# EAGLE board Juice Rescue v2 - hw1.0.2 (EAGLE 9.6.2)
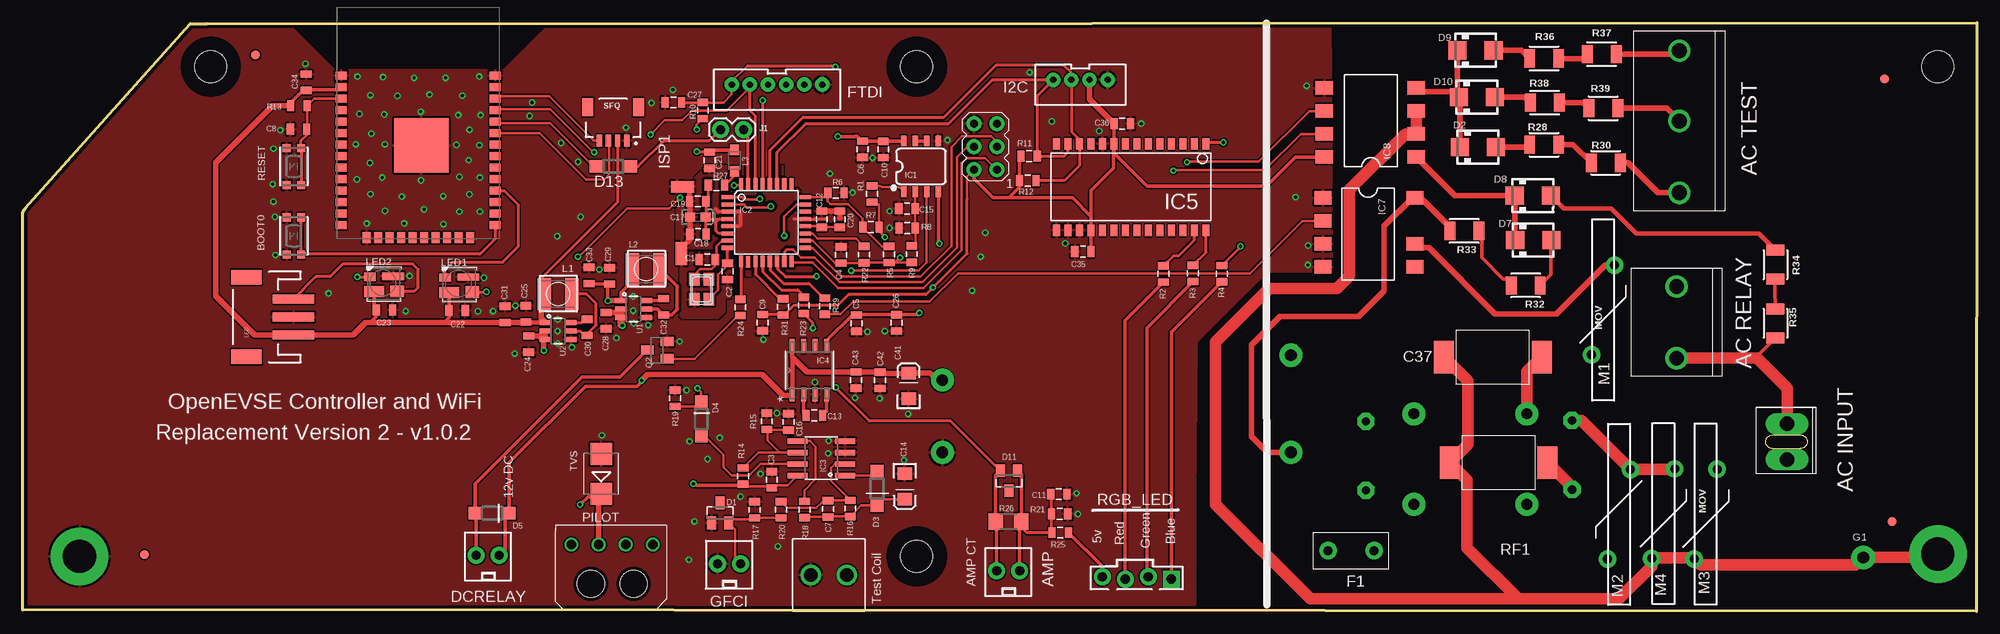
[diagram p0: board, top side]
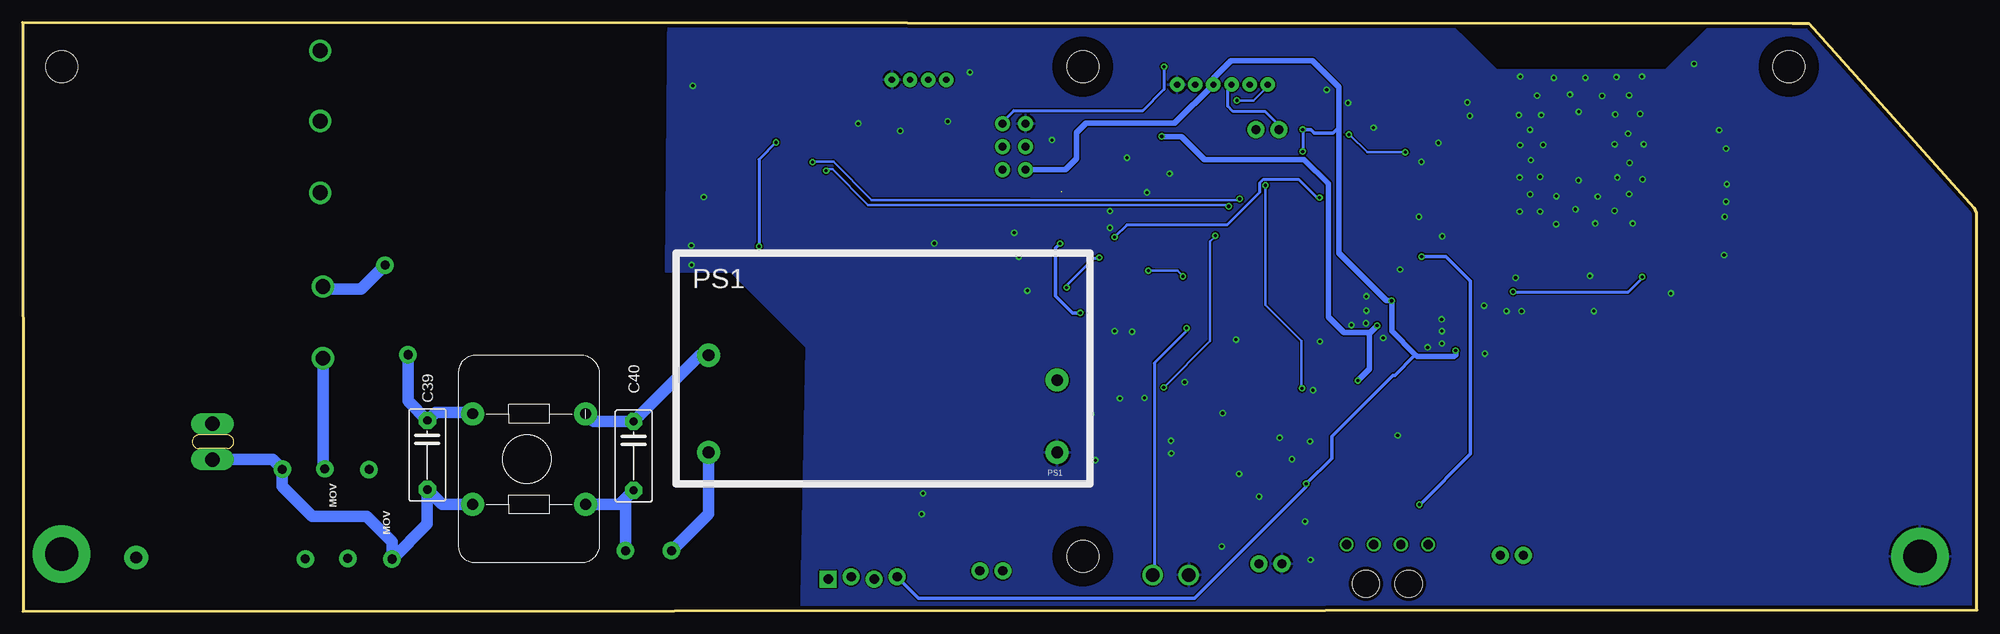
[diagram p1: board, bottom side, seen from below]

Size 215.82 x 65.06 mm. Coordinates in mm from the lower left corner, seen from the top.
Outline: 215.82,65.06 215.77,0 0,0.15 0.03,44.03 0.18,44.4 0.3,44.54 18.53,64.96 20.38,64.96 215.82,65.06
Copper layers (1*16): Top 0.0356mm / dielectric 1.5011mm / Bottom 0.0356mm
Design rules "default": minimum track width 6mil, minimum drill 13mil, track to track 6mil, track to pad 6mil, pad to pad 6mil, via to via 6mil, smd to smd 6mil, copper to edge 15mil, drill to drill 6mil, minimum pad ring 7mil, minimum via ring 7mil, stop-mask expansion 4mil, vias tented up to drill 0mil, thermal gap 10mil
Holes 3.56 mm at 211.51,60.18 98.74,60.18 98.74,6.08 20.76,60.18
tRestrict: area 95.6,2.9 to 101.9,9.3; area 17.6,57 to 23.9,63.4; area 95.6,57 to 101.9,63.4
bRestrict: area 95.6,2.9 to 101.9,9.3; area 17.6,57 to 23.9,63.4; area 95.6,57 to 101.9,63.4

## Footprints (pad centres in the part's own frame; a part is rotated, then mirrored left to right if it is on the bottom)
2POS3.66MM = drill 1.6 pad 1.93 long: P$5 0,2; P$6 0,-1.96
ACAMP3P = drill 1.65: P$1 0,7.77; P$2 0,-0.15; P$3 0,-7.92
MOLEX_2 = drill 1.016 pad 1.88: 1 -1.27,0; 2 1.27,0
BTN_KMR2_4.6X2.8 = smd 0.9 x 0.9: A 2.05,0.8; A' -2.05,0.8; B 2.05,-0.8; B' -2.05,-0.8
0805 = smd 0.8 x 1.2: 1 -0.9,0; 2 0.9,0
EIA3216 = smd 1.4 x 1.6: A 1.4,0; C -1.4,0
0603-POLAR = smd 1.1 x 1: + 0.85,0; - -0.85,0
DK1E3EA = smd 2.2 x 3.6: P$1 -5.4,0; P$2 5.4,0
C7.5B4 = drill 0.914 pad 1.905 octagon: 1 -3.81,0; 2 3.81,0
RN214-0.3-02-47M = drill 1.2 pad 2.54: P$1 14,6.5; P$2 1.5,6.5; P$3 14,16.5; P$4 1.5,16.5
SOT23 = smd 1 x 1.4: 1 -0.95,-1.1; 2 0.95,-1.1; 3 0,1.1
SMA = smd 2 x 2: A 2,0; C -2,0
SOD123 = smd 1.4 x 1.4: A 1.9,0; C -1.9,0
BELFUSE1A = drill 1 pad 1.93: IN 2,1.66; OUT 2,6.74
FIDUCIAL-1X2.5 = smd 1 x 1: 1 0,0
JST6 = drill 0.7 pad 1.6: 1 -5,-0.28; 2 -3,-0.28; 3 -1,-0.28; 4 1,-0.28; 5 3,-0.28; 6 5,-0.28
1X01 = drill 1.31 pad 2.6: 1 0,0
JST-4-PTH-VERT = drill 0.7 pad 1.6: 1 -3,-0.55; 2 -1,-0.55; 3 1,-0.55; 4 3,-0.55
SO08 = smd 0.6 x 1.2: 1 -1.905,-2.8; 2 -0.635,-2.8; 3 0.635,-2.8; 4 1.905,-2.8; 5 1.905,2.8; 6 0.635,2.8; 7 -0.635,2.8; 8 -1.905,2.8
TQFP32-08 = smd 1.27 x 0.457: 1 -4.293,2.8; 2 -4.293,2; 3 -4.293,1.2; 4 -4.293,0.4; 5 -4.293,-0.4; 6 -4.293,-1.2; 7 -4.293,-2; 8 -4.293,-2.8; 17 4.293,-2.8; 18 4.293,-2; 19 4.293,-1.2; 20 4.293,-0.4; 21 4.293,0.4; 22 4.293,1.2; 23 4.293,2; 24 4.293,2.8 | smd 0.457 x 1.27: 9 -2.8,-4.293; 10 -2,-4.318; 11 -1.2,-4.293; 12 -0.4,-4.293; 13 0.4,-4.293; 14 1.2,-4.293; 15 2,-4.293; 16 2.8,-4.293; 25 2.8,4.293; 26 2,4.293; 27 1.2,4.293; 28 0.4,4.293; 29 -0.4,4.293; 30 -1.2,4.293; 31 -2,4.293; 32 -2.8,4.293
SO08' = smd 0.61 x 2.21: 1 -1.905,-2.616; 2 -0.635,-2.616; 3 0.635,-2.616; 4 1.905,-2.616; 5 1.905,2.616; 6 0.635,2.616; 7 -0.635,2.616; 8 -1.905,2.616
SO-8 = smd 1.549 x 0.559: 1 -2.68,1.905; 2 -2.68,0.635; 3 -2.68,-0.635; 4 -2.68,-1.905; 5 2.68,-1.905; 6 2.68,-0.635; 7 2.68,0.635; 8 2.68,1.905
SO28W = smd 0.762 x 1.27: 1 -7.62,-4.78; 2 -6.35,-4.78; 3 -5.08,-4.78; 4 -3.81,-4.78; 5 -2.54,-4.78; 6 -1.27,-4.78; 7 0,-4.78; 8 1.27,-4.78; 9 2.54,-4.78; 10 3.81,-4.78; 11 5.08,-4.78; 12 6.35,-4.78; 13 7.62,-4.78; 14 8.89,-4.78; 15 8.89,4.78; 16 7.62,4.78; 17 6.35,4.78; 18 5.08,4.78; 19 3.81,4.78; 20 2.54,4.78; 21 1.27,4.78; 22 0,4.78; 23 -1.27,4.78; 24 -2.54,4.78; 25 -3.81,4.78; 26 -5.08,4.78; 27 -6.35,4.78; 28 -7.62,4.78
SIL8 = smd 1.5 x 1.9: P$1 -4,-5; P$2 -1.46,-5; P$3 1.08,-5; P$4 3.62,-5; P$5 3.62,5.16; P$6 1.08,5.16; P$8 -4,5.16
SIL8-2 = smd 1.5 x 1.9: P$1 -4,-5; P$2 -1.46,-5; P$3 1.08,-5; P$4 3.62,-5; P$5 3.62,5.16; P$6 1.08,5.16; P$7 -1.46,5.16; P$8 -4,5.16
AVRISP = drill 0.9 pad 1.626: 1 -1.27,2.54; 2 1.27,2.54; 3 -1.27,0; 4 1.27,0; 5 -1.27,-2.54; 6 1.27,-2.54
1X02 = drill 1.016 pad 1.88: 1 0,0; 2 2.54,0
MICROBUILDER_INDUCTOR_5X5MM_NR5040_NOTHERMALS = smd 1.5 x 3.6: P$1 -1.55,0; P$2 1.5,0
INDC2012X87 = smd 1.15 x 1: 1 -1.175,0; 2 1.175,0
JST-3-SMD = smd 1 x 4.6: 1 -1.99,-4.77; 2 0.01,-4.77; 3 2.01,-4.77 | smd 1.6 x 3.4: NC1 -4.39,0.43; NC2 4.41,0.43
LED3535 = smd 1.3 x 0.9: 1 -1.55,0.775 | smd 2.2 x 1.2: 2 -1.1,-0.875 | smd 1.5 x 1.3: 3 1.45,-0.825 | smd 2.4 x 0.8: 4 1,0.825
MOV = drill 1 pad 1.93: P$1 0,1.27; P$2 9.89,-1.27
IRM-10-5 = drill 1.3 pad 2.54: AC/L 3.6,3.45; AC/N 3.6,14.2; V+ 42.1,11.45; V- 42.1,3.45
NX3225 = smd 1.4 x 1.2: 1 -1.1,0.8; 2 1.1,0.8; 3 1.1,-0.8; 4 -1.1,-0.8
R1206 = smd 1.6 x 1.803: 1 -1.422,0; 2 1.422,0
1210 = smd 1.2 x 2: 1 -1.6,0; 2 1.6,0
GFCI_4 = drill 1.016 pad 1.88 square: 1 0,0.127 | drill 1.016 pad 1.88: 2 2.54,-0.127; 3 5.08,0.127; 4 7.62,-0.127
JST04_1MM_RA = smd 0.6 x 1.35: 1 -1.5,0; 2 -0.5,0; 3 0.5,0; 4 1.5,0 | smd 1.2 x 2: NC1 2.8,-3.675; NC2 -2.8,-3.675
SHORT_TOP-50 = smd 1.27 x 1.27: 1 0.635,0; 2 -0.635,0
2X4MM = drill 1.5: P$1 0,2; P$2 0,-2
SMB = smd 2.4 x 2.4: A 2.2,0; C -2.2,0
SOT23-6 = smd 0.55 x 1.35: 1 -0.95,-1.375; 2 0,-1.375; 3 0.95,-1.375; 4 0.95,1.375; 5 0,1.375; 6 -0.95,1.375
HOLE = drill 3.683 pad 6.35: P$1 0,0
AMPAC = drill 1.65: P$1 0,3.96; P$2 0,-3.96
4X3MM_MOLEX = drill 1.02: P$1 4.5,3; P$2 1.5,3; P$3 -1.5,3; P$4 -4.5,3 | hole 3: -2.35,-1.32; 2.35,-1.32
WROOM32_SKINNY = smd 1.2 x 0.9: 1 -8.5,5; 2 -8.5,3.73; 3 -8.5,2.46; 4 -8.5,1.19; 5 -8.5,-0.08; 6 -8.5,-1.35; 7 -8.5,-2.62; 8 -8.5,-3.89; 9 -8.5,-5.16; 10 -8.5,-6.43; 11 -8.5,-7.7; 12 -8.5,-8.97; 13 -8.5,-10.24; 14 -8.5,-11.51; 25 8.5,-11.51; 26 8.5,-10.24; 27 8.5,-8.97; 28 8.5,-7.7; 29 8.5,-6.43; 30 8.5,-5.16; 31 8.5,-3.89; 32 8.5,-2.62; 33 8.5,-1.35; 34 8.5,-0.08; 35 8.5,1.19; 36 8.5,2.46; 37 8.5,3.73; 38 8.5,5 | smd 0.9 x 1.2: 15 -5.7,-12.9; 16 -4.43,-12.9; 17 -3.16,-12.9; 18 -1.89,-12.9; 19 -0.62,-12.9; 20 0.65,-12.9; 21 1.92,-12.9; 22 3.19,-12.9; 23 4.46,-12.9; 24 5.73,-12.9 | smd 6 x 6: P$1 0.34,-2.7

## Placement (x,y rotation side)
AC  2POS3.96MM  [2POS3.66MM]  194.88,18.73 0 top
AC_TEST  AMPAC3P  [ACAMP3P]  182.96,54.03 180 top
AMP  AMP_CT  [MOLEX_2]  108.85,4.47 0 top
BOOT0  KMR2  [BTN_KMR2_4.6X2.8]  29.95,41.49 90 top
C1  22pf  [0805]  75.59,38.88 0 top
C2  22pf  [0805]  77.86,37.57 270 top
C3  .1uf  [0805]  82.74,14.55 90 top
C4  .1uf  [0805]  90.38,39.38 90 top
C5  10uf  [0805]  92.08,31.86 270 top
C6  10uf  [0805]  92.74,51.06 90 top
C7  .1uf  [0805]  88.94,11.33 270 top
C8  1.0uF  [0805]  30.46,53.27 180 top
C9  .1uf  [0805]  81.72,31.9 270 top
C10  .1uf  [0805]  95.05,51.04 270 top
C11  .1uf  [0805]  114.45,12.95 0 top
C12  .1uf  [0805]  88.26,43.34 90 top
C13  10uf  [0805]  87.43,21.65 180 top
C14  10uf  [EIA3216]  97.42,13.8 270 top
C15  .1uf  [0805]  97.67,44.5 0 top
C16  .1uf  [0805]  84.58,20.94 270 top
C17  10uF  [0603-POLAR]  74.57,43.57 0 top
C18  1uF  [0805]  74.59,41.71 0 top
C19  0.1uF  [0805]  74.56,45.31 0 top
C20  1uf  [0805]  90.25,43.34 90 top
C21  .1uf  [0805]  75.86,49.86 270 top
C22  .1uf  [0805]  47.99,33.26 0 top
C23  .1uf  [0805]  39.96,33.31 0 top
C24  10uf  [0805]  55.89,29.52 270 top
C25  22  [0805]  55.58,32.88 90 top
C26  .1uf  [0805]  96.5,31.88 90 top
C27  .1uf  [0805]  71.86,56.24 0 top
C28  10uf  [0805]  64.45,32.14 270 top
C29  22  [0805]  64.83,37.07 90 top
C30  100nf  [0805]  62.34,31.38 270 top
C31  22  [0805]  53.3,32.82 90 top
C32  100nf  [0805]  70.77,33.66 270 top
C33  22  [0805]  62.54,37.12 90 top
C34  .1uf  [0805]  31.3,58.45 90 top
C35  .1uf  [0805]  117.1,39.76 180 top
C36  .1uf  [0805]  121.44,53.88 0 top
C37  1000pf  [DK1E3EA]  162.36,28.1 0 top
C39  10000pf  [C7.5B4]  171.13,17.28 270 bottom
C40  10000pf  [C7.5B4]  148.34,17.18 270 bottom
C41  10uf  [EIA3216]  97.85,24.9 90 top
C42  1uf  [0805]  94.7,25.53 270 top
C43  .1uf  [0805]  92.03,25.56 90 top
CMC  RN214-0.3-02-47M  [RN214-0.3-02-47M]  167.65,5.34 0 bottom
D1  AZ23C5V6-7-F  [SOT23]  77.03,10.89 0 top
D2  1N4004  [SMA]  160.71,51.32 0 top
D3  1N4148  [SOD123]  94.35,13.59 90 top
D4  1N4148  [SOD123]  74.95,21.27 270 top
D5  1N4148  [SOD123]  51.85,10.87 180 top
D7  1N4004  [SMA]  166.82,41.01 0 top
D8  1N4004  [SMA]  166.78,45.94 0 top
D9  1N4004  [SMA]  160.46,61.98 0 top
D10  1N4004  [SMA]  160.61,56.8 0 top
D11  AZ23C2V7-7-F  [SOT23]  108.92,14.44 180 top
D13  1N4148  [SOD123]  65.23,49.18 180 top
DCRELAY  AMP_CT  [MOLEX_2]  51.37,6.18 0 top
F1  BEL1.6AFUSE  [BELFUSE1A]  142.5,8.7 270 top
FID1  FIDUCIAL1X2.5  [FIDUCIAL-1X2.5]  206.46,9.94 0 top
FID2  FIDUCIAL1X2.5  [FIDUCIAL-1X2.5]  25.69,61.48 0 top
FID3  FIDUCIAL1X2.5  [FIDUCIAL-1X2.5]  205.62,58.81 0 top
FID4  FIDUCIAL1X2.5  [FIDUCIAL-1X2.5]  13.44,6.26 0 top
FTDI  JST6  [JST6]  83.32,57.92 180 top
G1  M01PTH  [1X01]  203.28,5.95 0 top
GFCI  AMP_CT  [MOLEX_2]  78.01,5.27 0 top
I2C  [JST-4-PTH-VERT]  116.82,58.2 180 top
IC1  LMV358  [SO08]  99.21,49.18 0 top
IC2  ATMEGA328P-AU  [TQFP32-08]  82.12,42.97 0 top
IC3  LM358  [SO08']  88.21,16.93 90 top
IC4  TC1044S  [SO-8]  86.9,26.65 90 top
IC5  MCP23017SO  [SO28W]  123.07,46.9 180 top
IC7  AQH2223  [SIL8]  148.6,41.69 270 top
IC8  HCPL-2731S  [SIL8-2]  148.9,54.21 90 top
ISP1  ISP1  [AVRISP]  106.33,51.35 180 top
J1  [1X02]  77.07,53.25 0 top
L1  3.3uh  [MICROBUILDER_INDUCTOR_5X5MM_NR5040_NOTHERMALS]  59.11,35.06 180 top
L2  3.3uh  [MICROBUILDER_INDUCTOR_5X5MM_NR5040_NOTHERMALS]  68.84,37.8 180 top
L3  BLM21PG331SN1D  [INDC2012X87]  78.62,49.8 270 top
LED  3-PIN SMD  [JST-3-SMD]  25.15,32.52 90 top
LED1  WS2812B3535  [LED3535]  48.22,36.13 0 top
LED2  WS2812B3535  [LED3535]  39.91,36.2 0 top
M1  MOV  [MOV]  174.54,28.36 90 top
M2  MOV  [MOV]  176.3,15.67 270 top
M3  MOV  [MOV]  185.87,5.8 90 top
M4  MOV  [MOV]  181.2,5.86 90 top
PS1  IRM-10-5  [IRM-10-5]  143.67,14.1 0 bottom
Q1  16000  [NX3225]  74.99,35.58 90 top
Q2  2222A  [SOT23]  70.08,28.87 90 top
R1  820  [0805]  93.81,46.11 90 top
R2  220  [0805]  125.99,37.3 90 top
R3  220  [0805]  129.27,37.35 90 top
R4  220  [0805]  132.44,37.32 90 top
R5  56k  [0805]  95.69,39.44 270 top
R6  100k  [0805]  89.82,46.25 0 top
R7  200k  [0805]  93.68,42.45 0 top
R8  100k  [0805]  97.69,42.37 0 top
R9  100k  [0805]  98.2,39.49 90 top
R10  10k  [0805]  75.11,55.33 270 top
R11  4.7k  [0805]  111.16,50.3 180 top
R12  4.7k  [0805]  111,47.61 180 top
R13  10k  [0805]  30.51,55.86 0 top
R14  100k  [0805]  79.57,14.95 90 top
R15  20k  [0805]  82.18,21 90 top
R16  100k  [0805]  91.41,11.38 90 top
R17  422  [0805]  80.84,11.22 270 top
R18  100  [0805]  86.34,11.25 270 top
R19  10k  [0805]  72.05,23.54 90 top
R20  1k  [0805]  83.75,11.24 270 top
R21  100k  [0805]  114.51,10.78 0 top
R22  10k  [0805]  92.92,39.43 270 top
R23  330  [0805]  86.27,33.8 270 top
R24  330  [0805]  79.26,33.59 90 top
R25  100k  [0805]  114.59,8.7 180 top
R26  22  [R1206]  108.87,9.94 180 top
R27  2.0  [0805]  76.62,47.1 0 top
R28  180k  [1210]  168.03,51.57 0 top
R29  330  [0805]  88.59,33.74 90 top
R30  180k  [1210]  174.83,49.56 0 top
R31  10k  [0805]  83.98,33.64 270 top
R32  180k  [1210]  166,36.02 180 top
R33  180k  [1210]  159.21,42.04 180 top
R34  180k  [1210]  193.58,38.31 270 top
R35  180k  [1210]  193.58,31.82 270 top
R36  180k  [1210]  168.03,61.09 0 top
R37  180k  [1210]  174.4,61.58 0 top
R38  180k  [1210]  168.1,56.22 0 top
R39  180k  [1210]  174.56,55.58 0 top
RESET  KMR2  [BTN_KMR2_4.6X2.8]  29.95,49.16 90 top
RF1  1000pf  [DK1E3EA]  163,16.44 0 top
RGB_LED  GFCI_CT  [GFCI_4]  126.85,3.69 180 top
SFQ  [JST04_1MM_RA]  65.21,52.03 180 top
SH1  SHORT-HT5  [SHORT_TOP-50]  72.89,46.91 0 top
SH2  SHORT-HT5  [SHORT_TOP-50]  72.77,39.55 270 top
TEST_COIL  2X4MM  [2X4MM]  89.03,4.02 270 top
TVS  P6SMB16CA  [SMB]  63.91,15.19 90 top
U1  AP63203  [SOT23-6]  67.47,33.41 270 top
U2  AP63203  [SOT23-6]  59.14,30.97 270 top
U$3  HOLE  [HOLE]  211.51,6.33 0 top
U$8  AMPAC  [AMPAC]  182.66,31.94 180 top
U$9  HOLE  [HOLE]  6.28,6.08 0 top
U$25  4X3MM_MOLEX  [4X3MM_MOLEX]  65.11,4.38 0 top
X2  ESP32-WROOM-32  [WROOM32_SKINNY]  43.69,54.19 0 top

## Library data of the parts
AC AC_TEST AMP C37 DCRELAY FTDI GFCI IC4 IC7 IC8 M1-M4 PS1 RF1 RGB_LED TEST_COIL U$3 U$8 U$9 U$25 = OpenEVSE
BOOT0 RESET X2 = microbuilder
C1-C7 C9-C16 C18-C21 C26 C27 C35 C36 C41-C43 G1 IC3 R1-R12 R14-R25 R27 R29 R31 = SparkFun
C8 C22-C25 C28-C34 = SparkFun-Capacitors; PROD_ID: CAP-11625
C17 = SparkFun-Capacitors; PROD_ID: CAP-13210
C39 C40 = capacitor-wima
CMC = Schaffner-CM-Choke
D1-D5 D7-D11 D13 TVS = diode
F1 = Qxd
FID1-FID4 = SparkFun-Retired
I2C J1 = SparkFun-Connectors
IC1 = SparkFun-IC-Amplifiers; PROD_ID: IC-09657
IC2 = atmel; MPN: ATMEGA8-16AU; OC_FARNELL: 9171371; OC_NEWARK: 73M8863
IC5 ISP1 LED1 LED2 Q1 = adafruit
L1 L2 = ESP32_v1_SMPS
L3 = BLM21PG331SN1D; DESCRIPTION: Ferrite Beads Multi-Layer 330Ohm 25% 100MHz 1.5A 70mOhm DCR 0805 Paper T/R; MF: Murata; MP: BLM21PG331SN1D; PACKAGE: 0805 Murata
LED = SparkFun-Connectors; PROD_ID: CONN-12591
Q2 = transistor-npn
R13 = SparkFun-Resistors
R26 = rcl
R28 R30 R32-R39 = SparkFun-Resistors; PROD_ID: RES-12374
SFQ = SparkFun-Connectors; PROD_ID: CONN-13694
SH1 SH2 = shorts-old; BOM: no
U1 U2 = SparkFun-IC-Power; PROD_ID: VREG-15244

## Nets
3.3V: C22.1 C23.1 C25.1 C31.1 C34.1 L1.P$2 LED1.2 LED2.2 LED.1 R13.1 SFQ.2 U2.1 X2.2
+5V: C3.1 C4.1 C9.1 C21.1 C24.1 C29.1 C33.1 C35.1 C36.1 FTDI.3 I2C.2 IC2.18 IC3.8 IC5.9 IC5.18 IC8.P$8 ISP1.2 L2.P$2 L3.1 R5.2 R9.1 R10.2 R11.2 R12.2 R14.1 R22.2 R25.1 R31.2 RGB_LED.4 U1.1 U2.2 U2.3
+12V: C6.2 C10.1 C28.1 C41.A C42.1 C43.2 D5.C DCRELAY.2 IC1.8 IC4.1 IC4.8 PS1.V+ U1.2 U1.3
-12V1: C5.1 C26.2 IC1.4 IC4.5
AC_RELAY_1: IC2.13 R29.2
ACL: C40.2 CMC.P$1 F1.OUT
ACLFUSE: F1.IN IC7.P$8 PS1.AC/L R33.2
ACLIN: AC.P$6 C39.2 CMC.P$2 M2.P$2 M3.P$2 RF1.P$2
ACN: C40.1 CMC.P$3 PS1.AC/N
ACNIN: AC.P$5 C37.P$2 C39.1 CMC.P$4 M1.P$1 M2.P$1 M4.P$2 R35.2 U$8.P$1
ACRELAY: IC7.P$6 M1.P$2 U$8.P$2
ACTEST1: AC_TEST.P$3 R37.2
ACTEST2: AC_TEST.P$2 R39.2
ACTEST3: AC_TEST.P$1 R30.2
ADC3: IC2.26
ADC6: IC2.19 R22.1
ADC7: IC2.22
AMP_READ: AMP.1 D11.2 IC2.23 R26.2
AREF: C12.1 C20.1 IC2.20
BLUE: IC5.1 R4.2
DAMP: L3.2 R27.2
DC_RELAY_1: IC2.9 R24.2
DC_RELAY_1_O: D5.A DCRELAY.1 Q2.3
DC_RELAY_1_T: Q2.1 R24.1
DC_RELAY_2: IC2.10
ESPRESET: C8.1 R13.2 RESET.B RESET.B' X2.3
ESPSCL: SFQ.4 X2.36
ESPSDA: SFQ.3 X2.33
GFCI_INT: D4.C IC2.32 R19.1
GFCI_TEST: IC2.12 R23.1
GFI_TEST_O: R23.2 TEST_COIL.P$1
GMI_LINE: IC2.2 IC8.P$7
GND: BOOT0.A BOOT0.A' C3.2 C4.2 C5.2 C6.1 C8.2 C9.2 C10.2 C11.2 C14.C C15.1 C16.1 C22.2 C23.2 C24.2 C25.2 C26.1 C27.1 C28.2 C29.2 C31.2 C33.2 C34.2 C35.2 C36.2 C41.C C42.2 C43.1 D1.1 FTDI.1 GFCI.1 I2C.1 IC1.5 IC3.3 IC3.4 IC4.3 IC5.10 IC5.15 IC5.16 IC5.17 IC7.P$1 IC7.P$3 IC7.P$4 IC8.P$5 ISP1.6 LED1.4 LED2.4 LED.2 PS1.V- Q2.2 R6.2 R8.1 R15.2 R17.1 R19.2 R21.2 RESET.A RESET.A' SFQ.1 SH1.2 TEST_COIL.P$2 TVS.A U1.4 U2.4 U$9.P$1 X2.1 X2.15 X2.38 X2.P$1
GPIO0: BOOT0.B BOOT0.B' X2.25
GREEN: IC5.28 R3.2
LED: LED1.1 X2.28
MISO: IC2.16 ISP1.1
MOSI: IC2.15 ISP1.4
N$1: D2.C D9.C D10.C IC8.P$4
N$2: D7.C D8.C IC8.P$1
N$4: C1.2 IC2.7 Q1.2
N$5: C2.1 IC2.8 Q1.4
N$6: D7.A R32.1
N$7: AMP.2 C11.1 D11.1 R21.1 R25.2 R26.1
N$8: C7.1 IC3.2 R16.2 R20.1
N$9: D8.A R34.1
N$10: C15.2 IC1.2 R8.2 R9.2
N$11: IC1.1 R1.2
N$12: IC2.11 R31.1
N$13: R32.2 R33.1
N$14: IC1.6 IC1.7
N$15: C32.1 U1.6
N$16: C32.2 L2.P$1 U1.5
N$17: R34.2 R35.1
N$18: IC7.P$2 R29.1
N$19: C13.2 IC4.2
N$21: D3.A IC3.1
N$22: R36.2 R37.1
N$23: C7.2 C14.A D3.C R16.1 R18.2
N$24: C16.2 IC3.6 R14.2 R15.1
N$25: D4.A IC3.7
N$26: IC3.5 R18.1
N$27: C13.1 IC4.4
N$28: R38.2 R39.1
N$29: D9.A R36.1
N$30: D10.A R38.1
N$31: R3.1 RGB_LED.2
N$32: R2.1 RGB_LED.3
N$33: LED1.3 LED2.1
N$34: C30.1 U2.6
N$35: C30.2 L1.P$1 U2.5
N$36: R4.1 RGB_LED.1
N$37: IC2.31 J1.2
N$38: D2.A R28.1
N$39: R28.2 R30.1
N$40: D1.2 GFCI.2 R17.2 R20.2
PE: C37.P$1 G1.1 IC8.P$2 IC8.P$3 M3.P$1 M4.P$1 RF1.P$1 U$3.P$1
PILOT: R1.1 R7.2 TVS.C U$25.P$3
PILOTREAD: IC2.24 R5.1 R6.1 R7.1
PIX: LED2.3 LED.3
PP_READ: IC2.25
PWM: IC1.3 IC2.14
RED: IC5.27 R2.2
RESET: C27.2 FTDI.6 IC2.29 ISP1.5 R10.1
RX-I: FTDI.5 IC2.30 X2.35
RXD0: D13.A X2.34
SCK: IC2.17 ISP1.3
SCL: I2C.3 IC2.28 IC5.12 R12.1
SDA: I2C.4 IC2.27 IC5.13 R11.1
TX: D13.C FTDI.4 J1.1
UGND: C12.2 C17.- C18.1 C19.1 C20.2 C21.2 IC2.3 IC2.5 IC2.21 SH1.1 SH2.2
VCC: C17.+ C18.2 C19.2 IC2.4 IC2.6 R27.1
WELD_DETECT: IC2.1 IC8.P$6
XGND: C1.1 C2.2 Q1.1 Q1.3 SH2.1

## Tracks (layer width: path | path; a pad name or v marks a point on that pad's centre or on a via)
3.3V
  Top 0.305: SFQ.2 65.71,45.24 57.13,36.66 57.13,34.96 57.28,34.81 | 57.28,35.39 L1.P$2 57.33,34.78 57.33,32.35 U2.1 | 39.11,33.36 C23.1 | 47.04,33.21 C22.1
  Top 0.406: X2.2 34.94,57.66 31.41,57.66 C34.1 30.94,57.55 29.61,56.22 R13.1 | LED1.2 47.12,33.29 47.04,33.21 | C22.1 47.09,32.47 46.54,31.92 | LED2.2 38.81,33.67 39.11,33.36 | C23.1 39.06,32.6 38.39,31.92
  Top 0.508: U2.1 55.64,31.92
  Top 0.61: 55.64,31.92 C25.1 55.53,31.92 C31.1 46.54,31.92 38.39,31.92 37.9,31.92 36.5,30.53 LED.1 25.64,30.53 21.34,34.83 21.34,49.6 27.61,55.86 R13.1 | U2.1 57.28,32.4 57.28,34.81 57.28,35.39
+5V  (via drill 0.35)
  Top 0.254: R9.1 98.15,38.54 95.71,38.54 R5.2 R22.2 92.87,38.48 C4.1 89.73,38.48 87.24,40.97 IC2.18 | IC3.8 84.5,13.93 83.02,13.93 C3.1 82.59,13.81 79.82,13.81 | 79.82,13.81 79.57,13.81 | 79.82,13.81 R14.1 | R10.2 74.45,53.77 v74.45,53.25 | 104.3,45.51 104.3,48.05 ISP1.2
  Top 0.305: 104.3,45.51 104.3,39.52 100.72,35.93 100.68,35.93 v100.53,35.78 99.75,35 91.23,35 90.02,33.79 85.12,33.79 84.07,32.74 R31.2 83.91,32.81 C9.1 | v96.91,39.1 96.34,38.54 95.71,38.54 | 74.15,14.18 v74.07,14.1 | v74.45,50.81 75.81,50.81 C21.1
  Top 0.406: v64.62,34.32 64.62,35.96 C29.1 62.59,36.17 C33.1 | U1.1 66.09,35.25 67.34,36.49 L2.P$2 | C21.1 76.07,50.97 L3.1 | ISP1.2 105.06,47.82 107.17,45.7 108.92,45.7 | 108.92,45.7 110.1,46.89 R12.2 110.1,50.15 R11.2 | 108.92,45.7 115.93,45.7 117.99,43.65 IC5.18 | IC5.18 C35.1 | IC5.18 117.99,46.49 120.45,48.95 120.45,51.6 IC5.9 | IC5.9 120.53,53.87 C36.1 | IC5.9 120.53,50.64 124.19,46.99 137.37,46.99 140.59,50.21 IC8.P$8 | R14.1 79.42,13.9 74.43,13.9 74.15,14.18 | R25.1 119.23,4.96 RGB_LED.4
  Top 0.508: 57.09,30.3 57.22,30.42 U2.2 U2.3
  Top 0.61: U1.1 66.06,34.32 v64.62,34.32 | v57.56,28.81 57.56,29.82 U2.3 57.57,30.21 57.46,30.21 57.38,30.3 57.09,30.3 | C24.1 57.22,30.42 | I2C.2 117.81,58.74 117.81,56.61 C36.1
  Bottom 0.305: v100.53,35.78 100.53,35.98 97.49,39.02 96.91,39.02 v96.91,39.1 | v74.45,53.25 74.4,53.2 74.4,50.81 v74.45,50.81
  Bottom 0.406: v74.45,53.25 73.57,53.25 73.16,52.84 71.13,52.84 70.47,53.5 | 62.1,28.47 62.1,28.29 64.29,26.09 64.47,26.09 71.25,19.31 71.25,16.92 v74.07,14.1 74.07,13.77 86.41,1.44 116.86,1.44 RGB_LED.4
  Bottom 0.508: FTDI.3 84.32,58.9
  Bottom 0.61: v57.56,28.81 57.56,28.35 57.74,28.18 61.8,28.18 62.1,28.47 64.62,31 v64.62,34.32 65.21,34.32 70.47,39.58 70.47,53.5 70.47,57.95 73.39,60.87 82.35,60.87 84.32,58.9 | FTDI.3 88.59,53.93 88.6,53.93 98.41,53.93 99.45,52.89 99.45,50.02 100.66,48.81 ISP1.2
+12V  (via drill 0.35)
  Top 0.305: IC4.1 84.94,23.97
  Top 0.406: 84.91,23.94 84.94,23.97 | v90.02,52.48 91.95,52.48 92.01,52.54 92.17,52.54 C6.2 95.03,51.96 C10.1 97.25,51.94 IC1.8 | 64.83,33.04 64.31,32.9 C28.1 | 65.97,33.04 66.09,33.17 U1.2 | v68.36,25.51 68.36,25.33 67.88,24.85 62.16,24.85 53.75,16.44 D5.C 53.27,10.39 53.27,6.81 DCRELAY.2 | 85,28.07 85.02,28.05 85.12,27.95
  Top 0.508: IC4.8 85,28.07 | 85.02,28.05 85.02,24 IC4.1
  Top 0.61: v68.36,25.51 69.04,26.2 81.64,26.2 83.95,23.88 84.85,23.88 84.91,23.94 | 64.83,33.04 65.97,33.04 | PS1.V+ 101.03,25.55 100.24,26.35 97.9,26.35 C41.A 94.83,26.3 C42.1 92.06,26.43 C43.2 86.61,26.46 85.12,27.95
  Top 0.813: v66.22,31.58 66.09,31.71 U1.3 66.09,33.17
  Bottom 0.61: v68.36,25.51 68.38,25.51 67.09,26.8 67.09,30.72 v66.22,31.58 67.01,30.79 69.91,30.79 71.63,32.52 71.63,47.28 74.3,49.94 85.3,49.94 87.84,52.48 v90.02,52.48
-12V1  (via drill 0.35)  (1 unrouted)
  Top 0.406: v101.25,40.65 101.15,40.75 101.15,46.46 | IC4.5 88.81,29.93 91.64,32.76 C5.1 92.11,32.78 C26.2 98.82,32.78 v99.02,32.98
  Bottom 0.406: v101.25,40.65 101.73,40.17 101.73,34.83 99.88,32.98 v99.02,32.98
AC_RELAY_1
  Top 0.305: IC2.13 82.56,38.64 82.56,37.7 84.03,36.23 86.85,36.23 88.44,34.64 R29.2
ACL
  Bottom 1.27: CMC.P$1 149.87,11.84 C40.2 149.24,12.47 F1.OUT
ACLFUSE
  Top 0.61: R33.2 157.61,42.48 154.4,45.69 IC7.P$8 153.46,45.69 150.35,42.58 150.35,35.42 147.5,32.57 138.84,32.57 135.69,29.42 135.69,19.31 137.45,17.55 PS1.AC/L
  Bottom 1.27: F1.IN 140.07,10.79 PS1.AC/L
ACLIN
  Top 1.27: C39.2 171.13,13.71 RF1.P$2
  Bottom 1.27: CMC.P$2 169.5,11.84 C39.2 171.13,9.68 M2.P$2 175.03,7.7 177.86,10.52 183.85,10.52 187.14,13.82 M3.P$2 188.22,16.77 AC.P$6
ACN
  Bottom 1.27: PS1.AC/N 141.03,28.3 C40.1 152.79,20.99 CMC.P$3
ACNIN
  Top 0.406: 190.71,27.98 190.71,27.94 191.29,27.94 R35.2
  Top 0.61: 190.71,27.98 U$8.P$1
  Top 1.27: M4.P$2 182.39,15.67 M2.P$1 172.15,21.09 C39.1 | CMC.P$4 166.15,26.48 C37.P$2 | AC.P$5 194.88,24.65 191.52,28 182.68,28 U$8.P$1
  Bottom 1.27: CMC.P$4 165.98,22 170.21,22 C39.1 173.27,23.23 M1.P$1 | M4.P$2 182.53,15.68 182.76,15.68 182.66,15.78 U$8.P$1
ACRELAY
  Top 0.61: M1.P$2 174.78,38.25 169.37,32.85 162.62,32.85 155.29,40.18 154.19,40.18 IC7.P$6
  Bottom 1.27: U$8.P$2 182.38,35.62 178.44,35.62 M1.P$2
ACTEST1
  Top 0.61: R37.2 182.59,61.58 AC_TEST.P$3
ACTEST2
  Top 0.61: AC_TEST.P$2 181.56,55.58 R39.2
ACTEST3
  Top 0.61: AC_TEST.P$1 180.57,46.26 177.27,49.56 R30.2
ADC6
  Top 0.254: IC2.19 87.23,41.77 87.79,41.21 92.03,41.21 92.91,40.33 R22.1
AMP_READ  (via drill 0.35)
  Top 0.254: v84.11,41.51 84.11,43.62 85.45,44.97 IC2.23
  Top 0.305: R26.2 107.45,10.12 | D11.2 102.47,21.04 93.5,21.04 v89.8,24.75
  Top 0.406: AMP.1 107.58,9.99 107.45,10.12 | R26.2 107.45,15.01 D11.2
  Bottom 0.254: v84.11,41.51 84.11,41.44 84.69,40.85 84.69,29.85 v89.8,24.75
AREF
  Top 0.254: C20.1 C12.1 88.13,42.57 IC2.20
BLUE  (via drill 0.35)
  Top 0.305: IC5.1 130.86,51.85 132.59,51.85 v132.62,51.82 | v134.5,40.34 134.5,40.28 R4.2
  Bottom 0.305: v132.62,51.82 134.5,49.94 v134.5,40.34
DAMP
  Top 0.305: L3.2 78.45,48.46 78.45,47.98 77.57,47.1 R27.2
DC_RELAY_1
  Top 0.254: 79.33,34.55 R24.2
  Top 0.305: IC2.9 79.33,34.55
DC_RELAY_1_O
  Top 0.406: Q2.3 66,25.89 61.78,25.89 49.95,14.06 D5.A 50.1,10.73 DCRELAY.1
DC_RELAY_1_T
  Top 0.254: R24.1 79.01,32.69 74.23,27.9 71.2,27.9 Q2.1
ESPRESET
  Top 0.254: X2.3 32.2,56.65 R13.2 31.41,53.32 | 30.72,52 30.72,51.41
  Top 0.305: 30.72,51.41 30.72,51.24 RESET.B RESET.B' | 31.41,53.32 C8.1 31.36,52.65 30.72,52
ESPSCL
  Top 0.254: SFQ.4 63.07,52.03 58.15,56.95 52.5,56.95 X2.36
ESPSDA
  Top 0.254: SFQ.3 64.78,51.96 64.78,48.32 64.19,47.73 62.21,47.73 57.11,52.84 X2.33
GFCI_INT  (via drill 0.35)
  Top 0.254: IC2.32 79.19,47.12 78.57,47.12 v78.57,47.07 | v74.53,24.65 74.95,24.22 D4.C 74.81,23.17 74.79,23.08 74.36,22.64 R19.1
  Bottom 0.254: v78.57,47.07 78.57,33.87 74.61,29.9 74.61,24.65 v74.53,24.65
GFCI_TEST
  Top 0.305: IC2.12 81.74,38.66 81.74,37.57 83.8,35.52 85.63,35.52 86.27,34.88 R23.1
GFI_TEST_O  (via drill 0.35)
  Top 0.305: v87.28,31.3 87.28,31.89 R23.2
  Bottom 0.305: v87.28,31.3 87.28,31 90.85,27.43 90.85,4.21 TEST_COIL.P$1
GMI_LINE  (via drill 0.35)
  Top 0.254: IC2.2 79.69,44.97 80.02,44.64 82.51,44.64 v82.63,44.76 | v127.08,48.7 127.13,48.75 137.17,48.75 141.17,52.75 IC8.P$7
  Bottom 0.254: v82.63,44.76 82.78,44.91 122.46,44.91 126.4,48.85 126.93,48.85 v127.08,48.7
GND  (via drill 0.35)
  other vias: 95.74,42.38 95.74,44.23 106.31,41.84 105.8,39.2 104.86,35.44 141.81,58.07 102.14,52.08 93.86,50.12 89.16,48.37 91.65,46.29 87.48,25.33 81.82,30.03 89.01,18.85 88.96,17.46 97.34,16.7 81.49,15.2 83.29,21.9 76.99,19.18 75.65,16.82 73.59,5.7 83.39,7.17 27.92,39.38 65.56,30.21 67.47,31.83 63.68,37.78 69.45,56.19 73.31,24.44 73.64,18.78 38.01,42.86 50.43,59.09 36.99,59.09 39.81,59.04 43.24,58.96 46.72,58.96 48.57,56.98 44.94,57.11 41.38,56.95 38.41,57.03 37.19,54.97 39.94,54.92 38.51,52.79 40.01,51.62 36.79,51.62 44,47.63 43.97,55.2 38.36,49.56 47.91,51.54 48.11,54.85 50.58,54.85 49.36,53.22 50.45,51.52 49.26,49.87 48.24,48.01 50.5,47.94 49.33,46.08 36.91,47.73 39.71,47.94 38.41,46.11 41.87,45.83 46.44,45.88 50.5,44.18 48.24,44.18 44.33,44.43 40.01,44.25 42.15,42.86 46.46,42.78 56.27,56.24 31.22,60.51 28.45,53.17 27.69,51.14 27.62,47.2 27.69,45.27 27.84,43.59 66.63,53.45 51.95,33.18 33.79,35.14 42.73,37.07 50.93,36.86 54.34,28.48 54.41,33.79 60.66,29.17 50.27,33.15 42.3,33.18 61.63,43.59 59.04,41.44 61.35,49.66 59.47,51.77 55.99,54.74 63.96,19.44 140.6,45.78 141.97,40.42 141.94,38.29 115.14,40.67 123.53,53.91 74.2,9.94 79.28,12.68 72.55,29.83 71.81,57.64 93.3,30.89 116.39,13.04 116.54,10.75 118.9,53.09 113.65,54.14 111.21,59.57 59.09,29.6 59.11,32.27 59.09,30.97 67.42,33.23 67.42,34.81 69.07,31.63 95.21,30.97 91.93,23.58 94.65,23.53 97.8,21.8
  pour Bottom: -6.15,65.07 29.1,65.07 34.4,59.77 52.99,59.77 61.18,67.96 144.5,67.05 144.75,37.55 137.65,37.55 129.27,29.17 130.13,-15.04 -5.69,-8.93
  pour Top (rank 3): -3.43,65.39 28.88,65.39 34.47,59.8 53.09,59.8 62.02,68.72 144.42,67.24 144.57,37.55 137.45,37.55 129.64,29.74 129.48,12.18 129.48,-13.46 -3.43,-11.7
GPIO0
  Top 0.305: X2.25 52.19,41.15 50.52,39.48 30.8,39.48 BOOT0.B' BOOT0.B
GREEN
  Top 0.305: R3.2 130.69,39.67 IC5.28
LED
  Top 0.305: X2.28 53.2,46.49 54.74,44.94 54.74,40.32 53.02,38.59 47.48,38.59 46.67,37.78 LED1.1
MISO
  Top 0.254: IC2.16 84.93,38.57 87.22,38.57 90.05,35.73 99.51,35.73 103.71,39.93 103.71,49.53 104.27,50.1 106.31,50.1 ISP1.1
MOSI
  Top 0.254: IC2.15 84.13,39.73 84.39,39.99 85.1,39.99 85.96,39.12 87.47,39.12 90.21,36.38 99.38,36.38 103.2,40.21 103.2,50.2 104.37,51.37 104.39,51.35 ISP1.4
N$1
  Top 0.61: D2.C 158.71,56.55 | 158.71,56.55 158.71,56.7 D10.C 157.98,57.44 154.3,57.44 IC8.P$4 | D9.C 158.46,56.8 158.71,56.55
N$2
  Top 0.61: D7.C 164.82,45.9 D8.C 158.17,45.94 IC8.P$1
N$4
  Top 0.254: IC2.7 77.24,40.97 76.65,40.38 76.65,39.03 C1.2 76.44,38.82 76.44,38.18 76.11,37.85 74.81,37.85 74.19,37.23 Q1.2
N$5
  Top 0.254: Q1.4 76.82,35.51 76.82,37.22 77.83,38.24 77.83,38.5
  Top 0.305: C2.1 77.83,38.5 IC2.8
N$6
  Top 0.406: D7.A 168.77,40.96 168.77,37.2 R32.1
N$7
  Top 0.254: 113.65,10.81 R21.1 | R26.1 110.19,9.84 110.19,9.76
  Top 0.305: 110.19,9.45 110.94,8.7 R25.2 113.65,8.74 113.65,10.81 | R21.1 113.61,12.89 C11.1
  Top 0.406: AMP.2 110.12,9.76 R26.1 110.29,15.11 D11.1
  Top 0.61: 110.19,9.45 110.19,9.76 | 110.19,9.76
N$8
  Top 0.254: C7.1 88.99,12.28 R16.2 89.26,14.43 89.26,15.83 89.72,16.29 IC3.2 | R20.1 84.44,11.45 84.44,11.41 87.61,11.41 88.27,12.07 89,12.07 89.01,12.09
  Top 0.305: C7.1 89.01,12.15 89.01,12.09
N$9
  Top 0.508: D8.A 170.2,44.52 175.46,44.52 178.24,41.74 191.75,41.74 R34.1
N$10
  Top 0.254: R9.2 98.59,40.77 R8.2 98.57,42.39 C15.2 IC1.2
N$11
  Top 0.254: IC1.1 96.81,46.87 94.92,46.87 94.74,47.01 R1.2
N$12
  Top 0.305: IC2.11 80.93,37.25 83.64,34.54 R31.1
N$13
  Top 0.406: R32.2 164.4,36.58 164.24,36.74 163.48,36.74 161.14,39.07 161.14,41.71 R33.1
N$14
  Top 0.406: IC1.7 IC1.6
N$15
  Top 0.406: C32.1 70.57,34.36 U1.6
N$16
  Top 0.406: U1.5 70.13,33.41 C32.2 71.67,32.76 72.27,33.36 72.27,35.92 L2.P$1
N$17
  Top 0.406: R34.2 193.53,35.72 R35.1
N$18
  Top 0.254: IC7.P$2 141.36,43.15 135.57,37.36 103.28,37.36 100.18,34.26 91.74,34.26 90.35,32.88 88.63,32.88 R29.1
N$19
  Top 0.406: C13.2 86.27,21.92 IC4.2
N$21
  Top 0.254: IC3.1 93.88,15.02 D3.A
N$22
  Top 0.61: R37.1 172.32,61.09 R36.2
N$23
  Top 0.254: C14.A 95.06,12.41 D3.C 92.62,11.69 R16.1 88.99,10.48 C7.2 86.42,10.43 R18.2
N$24
  Top 0.254: C16.2 82.25,20.04 | 82.25,20.04 R15.1 | IC3.6 83.6,17.56 | 82.25,20.04 82.25,18.91 83.6,17.56 | R14.2 81.28,17.56 83.6,17.56
N$25
  Top 0.254: IC3.7 81.52,16.29 80.25,15.02 78.31,15.02 77.4,15.93 77.4,17.28 75.31,19.37 D4.A
N$26
  Top 0.254: IC3.5 86.95,18.83 87.59,18.19 87.59,14.64 86.34,13.4 R18.1
N$27
  Top 0.406: IC4.4 88.81,22.12 C13.1
N$28
  Top 0.61: R39.1 172.32,56.22 R38.2
N$29
  Top 0.61: R36.1 165.54,61.98 D9.A
N$30
  Top 0.61: R38.1 165.92,56.8 D10.A
N$31
  Top 0.406: R3.1 124.16,31.34 124.16,3.97 RGB_LED.2
N$32
  Top 0.406: R2.1 121.75,32.15 121.75,3.59 RGB_LED.3
N$33  (via drill 0.35)
  Top 0.305: LED1.3 51.1,35.3 51.11,35.31 v51.21,35.31 | v36.95,36.95 38.33,36.95 LED2.1
  Bottom 0.305: v51.21,35.31 38.51,35.31 36.91,36.91 v36.95,36.95
N$34
  Top 0.305: U2.6 61.68,31.92 62.03,32.28 C30.1
N$35
  Top 0.305: U2.5 61.59,30.97 62.08,30.48 C30.2 62.34,30.64 63.35,31.66 63.35,33.99 62.29,35.06 L1.P$1
N$36
  Top 0.305: 126.88,3.54 RGB_LED.1
  Top 0.406: R4.1 126.88,30.86 126.88,3.54
N$37
  Top 0.305: IC2.31 80.13,52.73 J1.2
N$38
  Top 0.61: R28.1 166.17,51.32 D2.A
N$39
  Top 0.61: R30.1 171.23,51.57 R28.2
N$40
  Top 0.254: R20.2 83.73,10.31 R17.2 80.69,10.17 78.36,10.17 D1.2 78.7,9.07 78.7,5.85 GFCI.2
PE
  Top 0.305: M4.P$1 179.98,5.91 180.21,5.91
  Top 1.27: U$3.P$1 209.84,5.95 G1.1 202.47,5.14 185.27,5.14 M3.P$1 184.5,5.91 180.21,5.91 | M4.P$1 179.93,5 176.31,1.38 165.18,1.38 | IC8.P$3 IC8.P$2 152.7,52.75 146.54,46.59 146.54,37.04 145.17,35.67 137.65,35.67 131.76,29.78 131.76,11.84 142.22,1.38 165.18,1.38 | C37.P$1 159.62,25.44 159.62,18.46 RF1.P$1 159.52,14.52 159.52,7.04 165.18,1.38
PILOT  (via drill 0.35)
  Top 0.254: R7.2 94.58,44.96 R1.1 | v72.6,45.73 71.38,44.51 66.78,44.51 61.47,39.2 v61.32,39.2
  Top 0.305: v95.23,41.36 94.58,42.02 R7.2
  Top 0.406: v61.56,11.81 62.43,12.67 63.59,12.67 TVS.C
  Top 0.61: TVS.C 63.61,12.69 U$25.P$3
  Bottom 0.305: v95.23,41.36 93.89,42.71 82.82,42.71 79.23,46.3 79.23,47.35 78.84,47.73 74.89,47.73 72.89,45.73 v72.6,45.73
  Bottom 0.406: v61.32,39.2 58.63,39.2 55.91,36.48 55.91,17.38 61.53,11.77 v61.56,11.81
PILOTREAD
  Top 0.254: IC2.24 88.43,45.77 R6.1 88.92,45.34 89.24,45.02 91.17,45.02 92.78,43.41 R7.1 94.89,40.34 R5.1
PIX
  Top 0.305: LED2.3 43.28,35.38 43.69,35.8 43.69,37.78 43.09,38.39 35.36,38.39 33.97,36.99 32.38,36.99 LED.3
PWM  (via drill 0.35)
  Top 0.254: IC1.3 99.84,38.53 98.97,37.65 v91.5,37.65
  Top 0.305: IC2.14 83.37,38.63 83.37,37.85 84.23,36.99 87.64,36.99 v87.67,37.03
  Bottom 0.254: v91.5,37.65 88.3,37.65 v87.67,37.03
RED
  Top 0.305: R2.2 127.08,39.29 127.65,39.29 129.42,41.05 IC5.27
RESET  (via drill 0.35)
  Top 0.254: R10.1 77.39,56.23 78.32,57.16 FTDI.6 78.32,58.56 80.02,60.26
  Top 0.305: C27.2 R10.1 | v89.77,60.18 89.69,60.26 80.02,60.26 | v81.73,56.46 81.73,54.7 IC2.29
  Bottom 0.254: v81.73,56.46 79.88,56.46 78.32,58.02 FTDI.6
  Bottom 0.305: v89.77,60.18 89.77,57.69 92.11,55.35 106.36,55.35 107.63,54.08 107.63,53.92 ISP1.5
RX-I  (via drill 0.35)
  Top 0.254: X2.35 52.3,55.48 58.28,55.48 63.02,50.73 v63.13,50.73 | v69.35,52.69 70.92,54.26 72.83,54.26 73.92,55.35 77.76,55.35 80.32,57.92 FTDI.5
  Top 0.305: IC2.30 80.93,54.72 80.32,55.33 FTDI.5
  Bottom 0.254: v63.13,50.73 67.32,50.73 69.27,52.69 v69.35,52.69
RXD0
  Top 0.254: X2.34 52.37,53.93 58.26,53.93 63,49.18 D13.A
SCK
  Top 0.254: IC2.17 87.21,40.17 90.39,36.98 99.19,36.98 102.56,40.36 102.56,51.31 103.77,52.51 106.97,52.51 107.6,51.88 ISP1.3
SCL
  Top 0.305: IC2.28 82.53,50.95 86.19,54.62 101.76,54.62 107.51,60.37 114.96,60.37 115.82,59.51 I2C.3 115.85,58.72 115.85,53.01 116.72,52.13 IC5.12 116.72,49.26 115.07,47.61 R12.1
SDA
  Top 0.305: IC2.27 83.33,50.74 86.49,53.91 102.25,53.91 107.1,58.75 I2C.4 112.02,56.95 112.02,50.34 R11.1 115.02,50.3 115.45,50.73 IC5.13
TX
  Top 0.305: D13.C 67.98,49.18 70.82,52.03 75.85,52.03 J1.1
  Bottom 0.305: J1.1 77.07,53.7 78.59,55.23 82.15,55.23 82.73,55.81 82.73,57.78 FTDI.4
UGND
  Top 0.305: 85.17,43.39 85.2,43.37 IC2.21 88.68,43.37 88.75,43.44
  Top 0.406: 76.51,44.46 76.8,44.17 IC2.3 79.11,44.17 79.31,43.98 79.31,42.71 79.17,42.57 IC2.5
  Top 0.61: C12.2 C20.2 90.25,43.47 | SH2.2 73.69,41.11 C18.1 73.69,43.55 C17.- 73.72,45.26 C19.1 73.66,46.77 SH1.1
  pour Top (isolate 0.305, rank 2): 72.25,45.93 75.54,49.23 83.93,49.23 83.93,48.3 87.92,44.31 90.85,44.31 90.85,42.46 87.13,42.46 87.13,37.5 86.73,37.1 79.13,37.1 78.89,37.34 78.89,39.34 78.33,39.9 72.25,39.9
VCC
  Top 0.254: C18.2 75.43,41.71 75.42,41.71
  Top 0.305: R27.1 75.72,45.57 C19.2 75.46,43.62 C17.+ | C17.+ 75.42,41.71 | C17.+ 75.63,43.37 76.92,43.37 | 76.92,43.37 IC2.4 | IC2.6 76.87,41.77 76.59,42.04 76.59,43.04 76.92,43.37
WELD_DETECT  (via drill 0.35)
  Top 0.254: v81.41,45.58 81.36,45.52 79.74,45.52 79.5,45.77 IC2.1 | v128.58,49.64 128.62,49.68 136.48,49.68 142.09,55.29 IC8.P$6
  Bottom 0.254: v81.41,45.58 81.53,45.46 104.64,45.46 104.65,45.47 122.05,45.47 126.3,49.72 128.51,49.72 v128.58,49.64
XGND
  pour Top (isolate 0.254): 78.19,39.65 73.29,39.65 72.59,38.95 72.59,32.65 72.89,32.35 76.79,32.35 77.59,33.15 77.59,34.65 78.19,34.65

## Text on the board
tNames: AC TEST | AC RELAY | _ | OpenEVSE Controller and WiFi | Replacement Version 2 - v1.0.2 | 12v DC | AC INPUT | PILOT | _ | 5v | Red | Green | Blue | AMP CT | F1 | Test Coil
bNames: PS1